# Altium PCB PCB_BSPDV1_1.PcbDoc
Units mm, origin at the board's own origin, x right, y up, seen from the top; angles counter-clockwise.
Board outline 58.04 x 53.09 mm, 4 copper layers (Top Layer, Int1 (GND), Int2 (PWR), Bottom Layer), stack 1.369 mm thick; 79 components, 58 nets, 256 pads, 50 vias.
Unrouted connection lines stored in the file: 2.
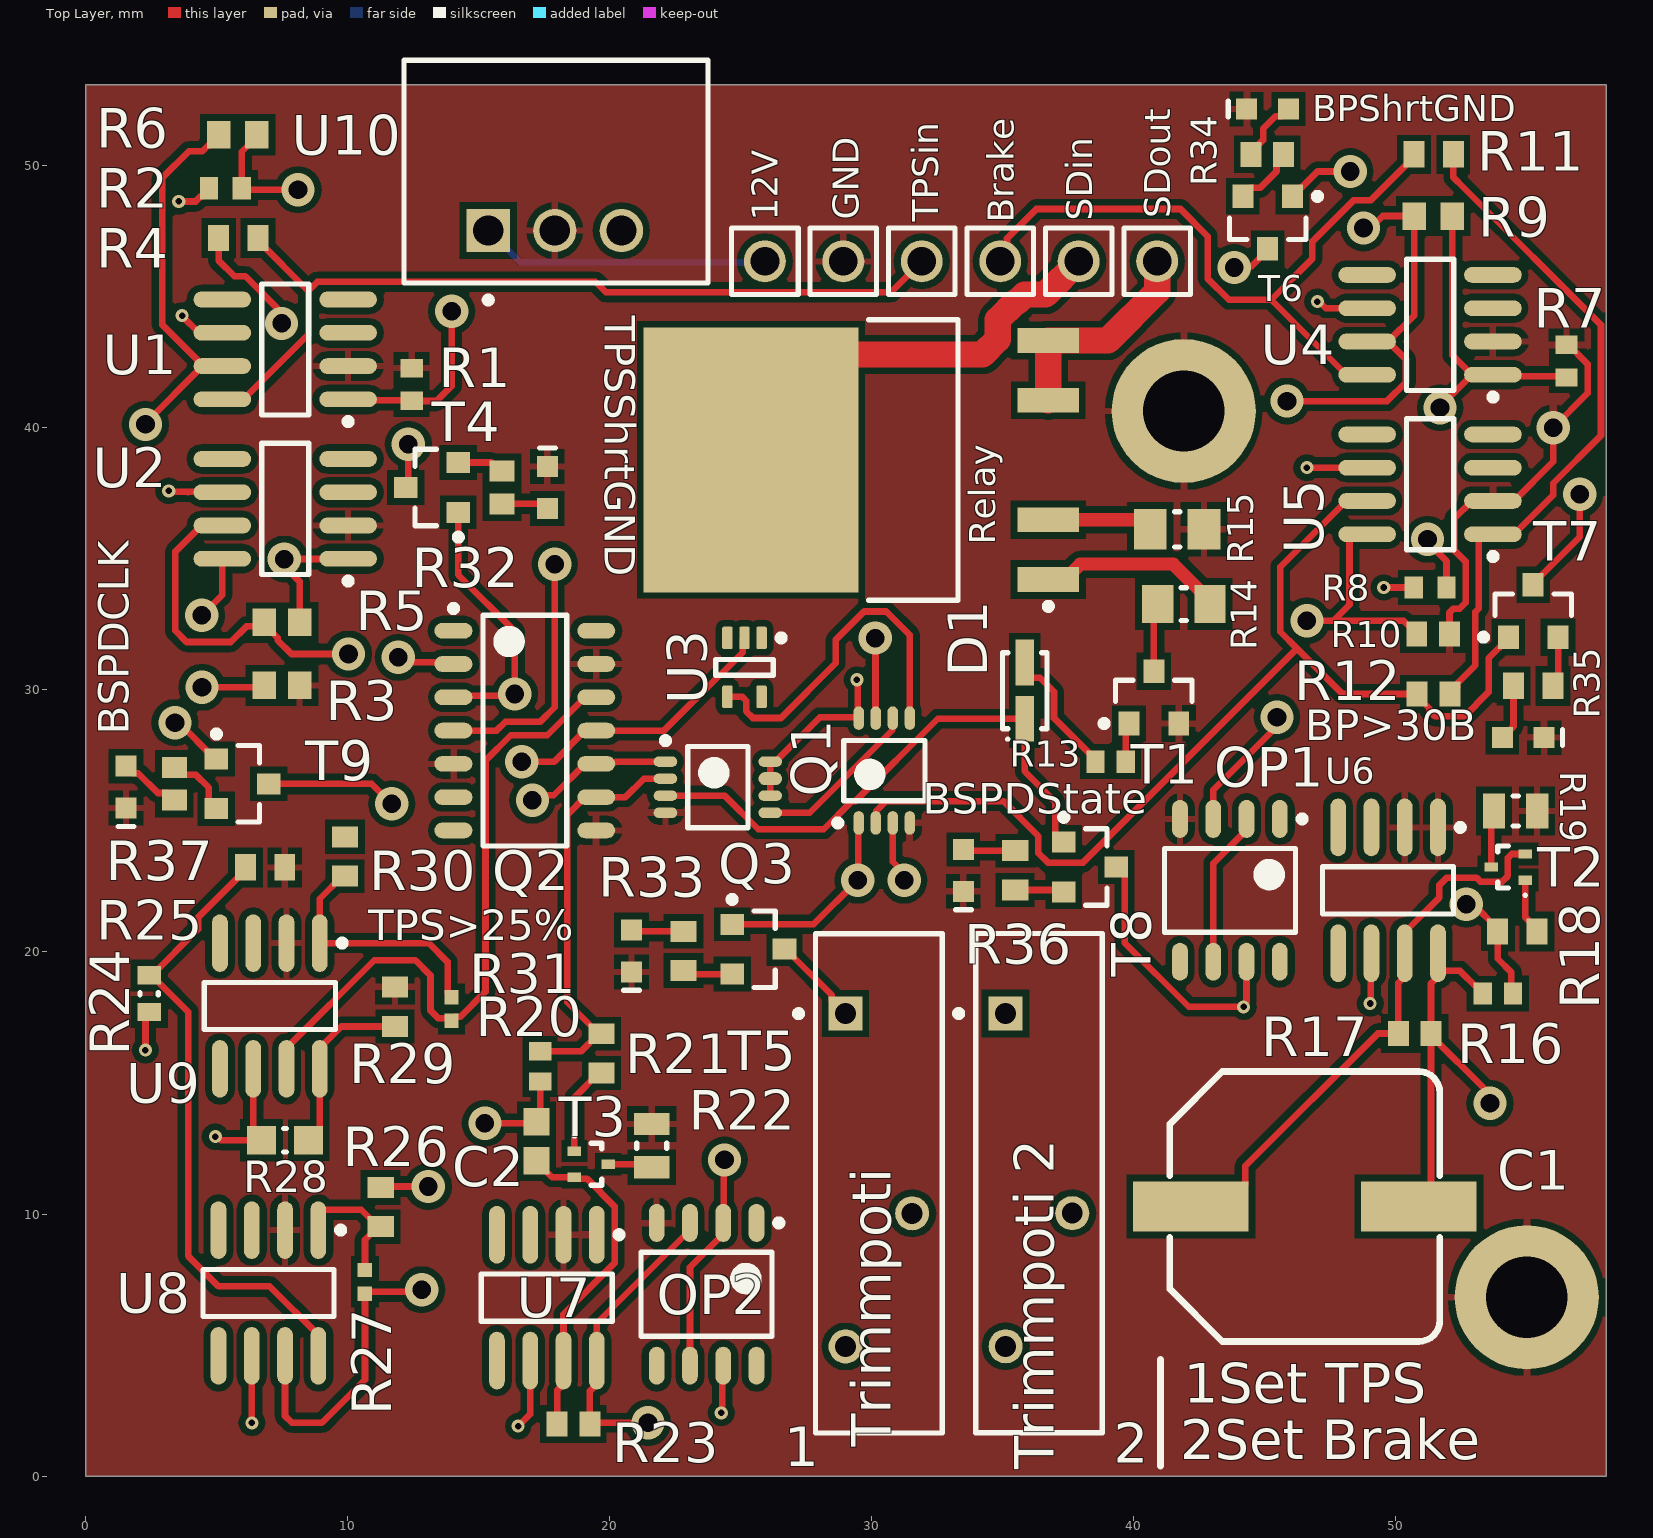
[diagram p0: Top Layer view]
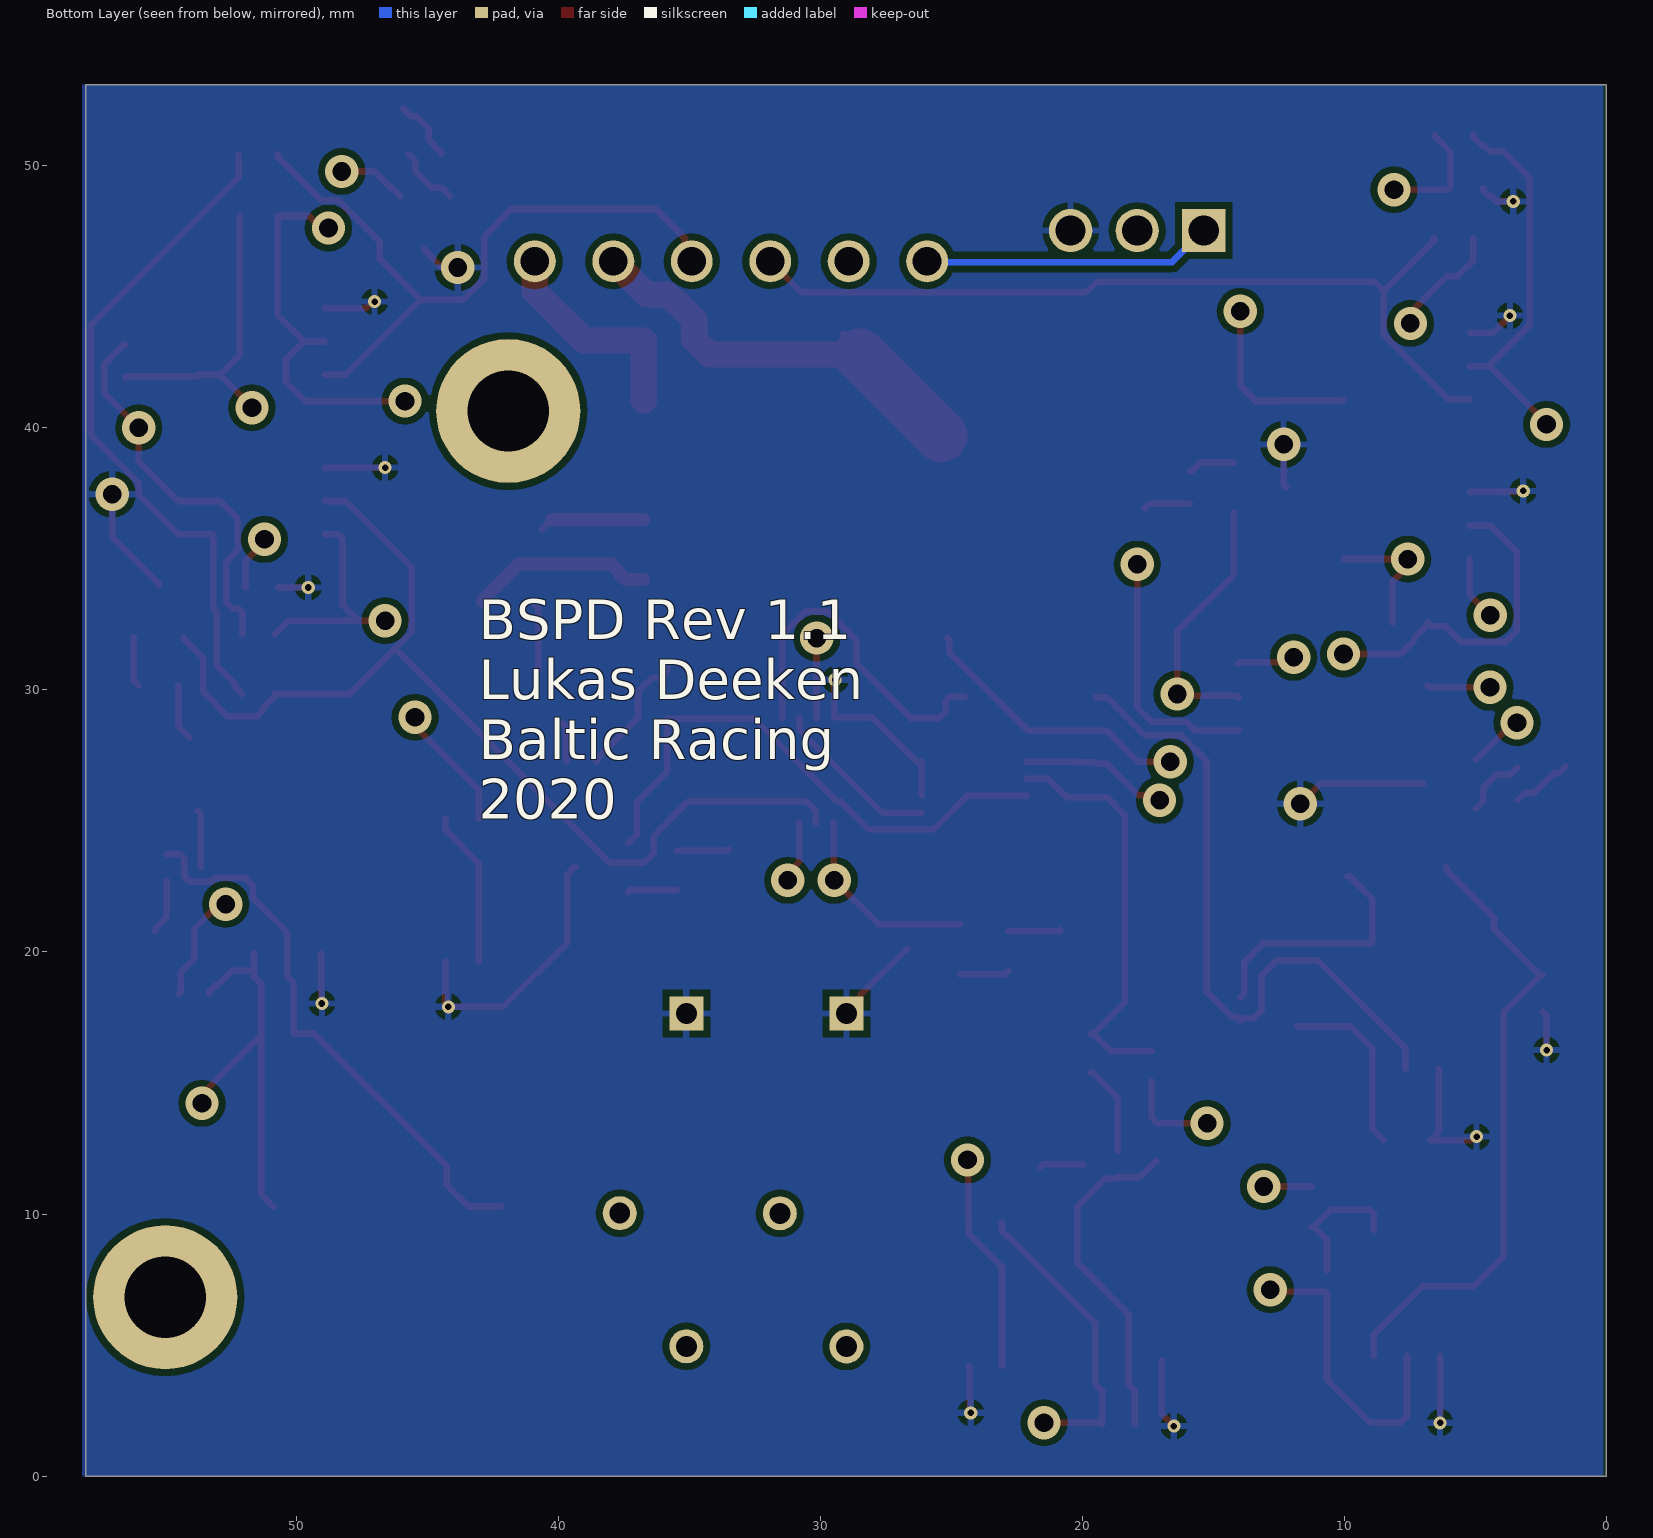
[diagram p1: Bottom Layer view, seen from below]
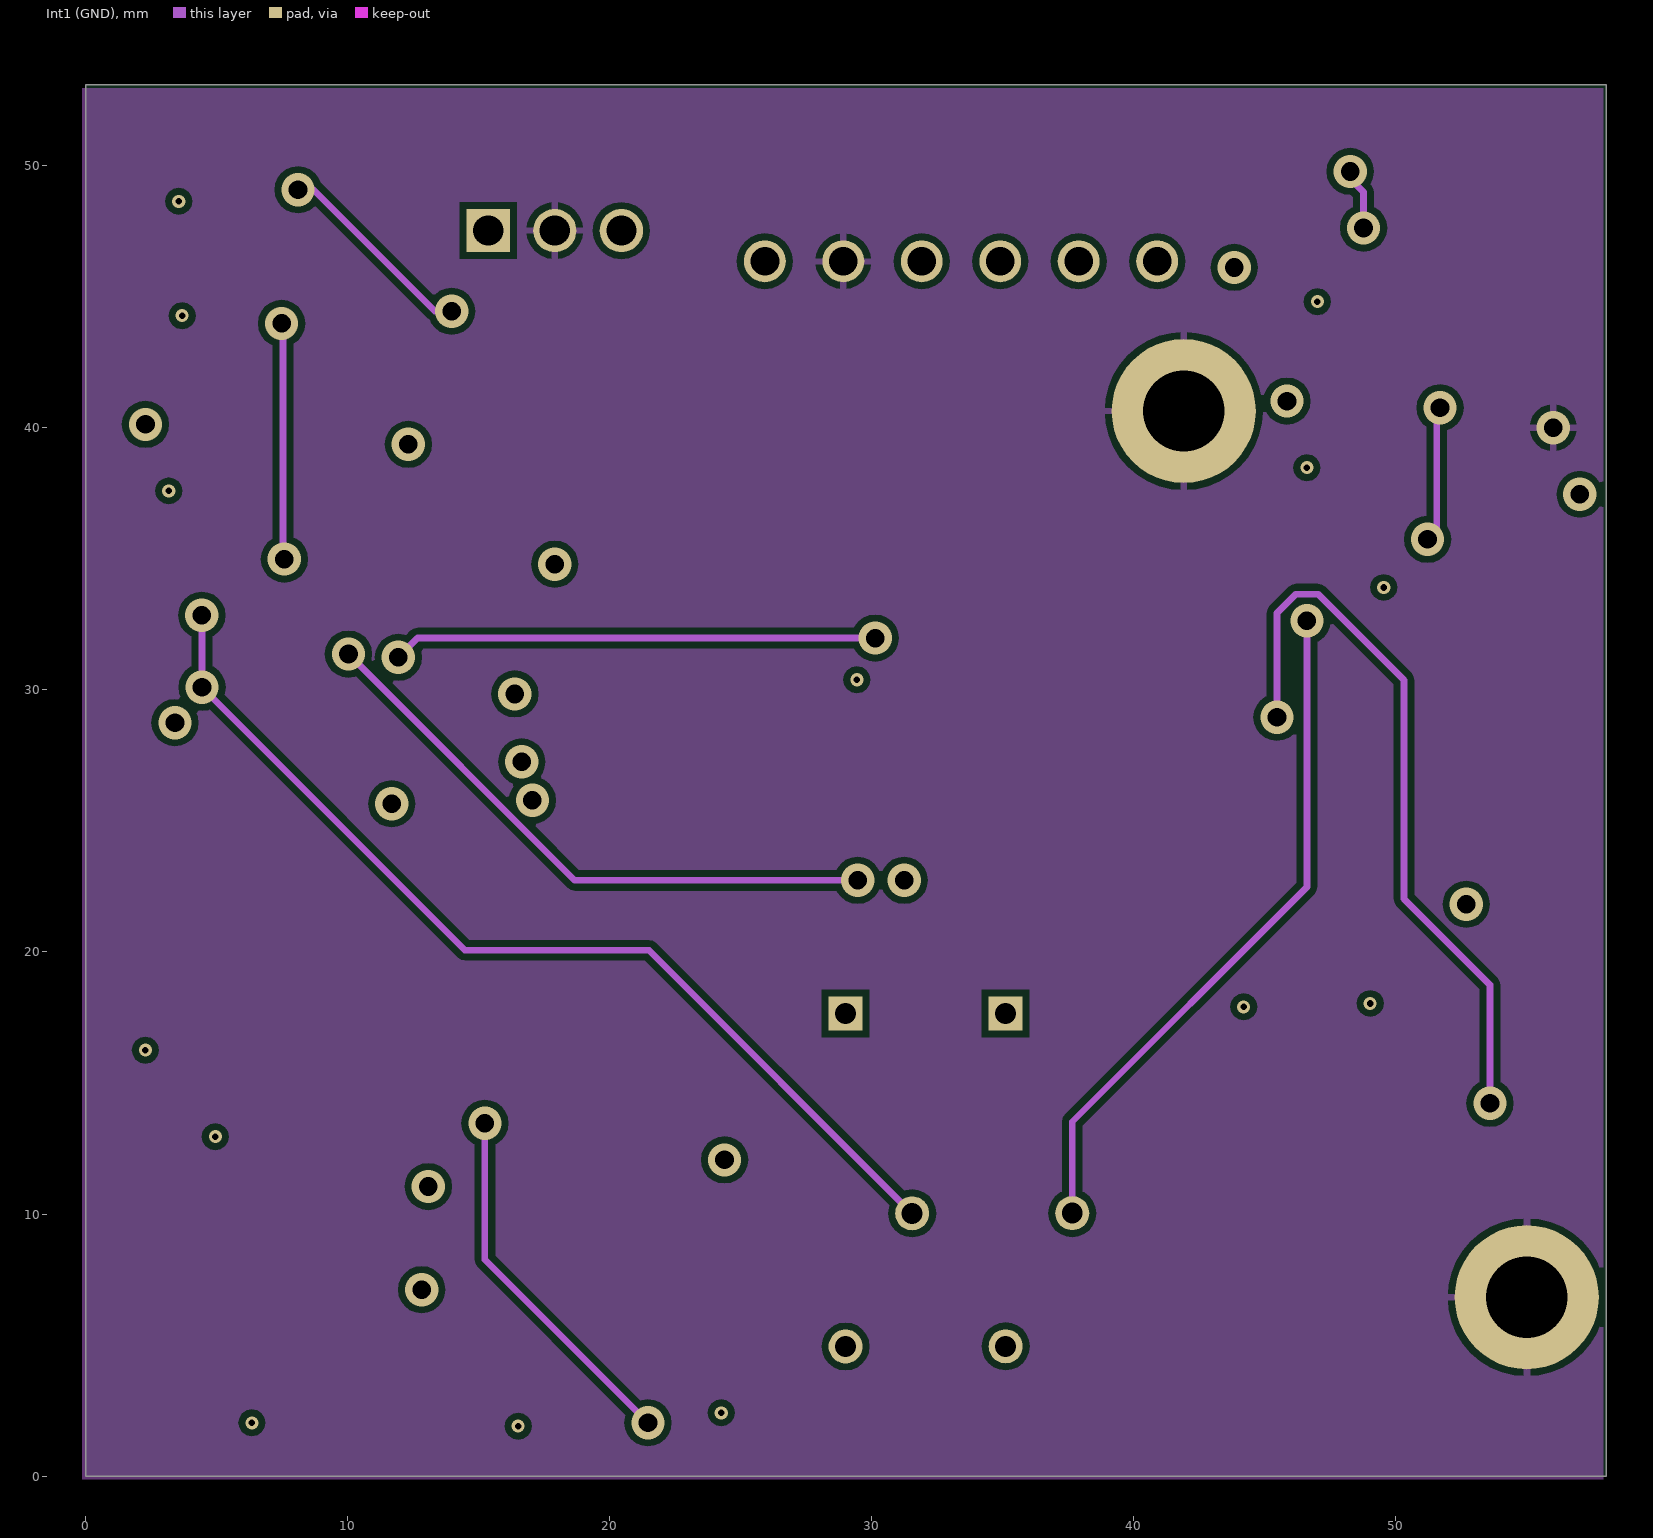
[diagram p2: Int1 (GND)]
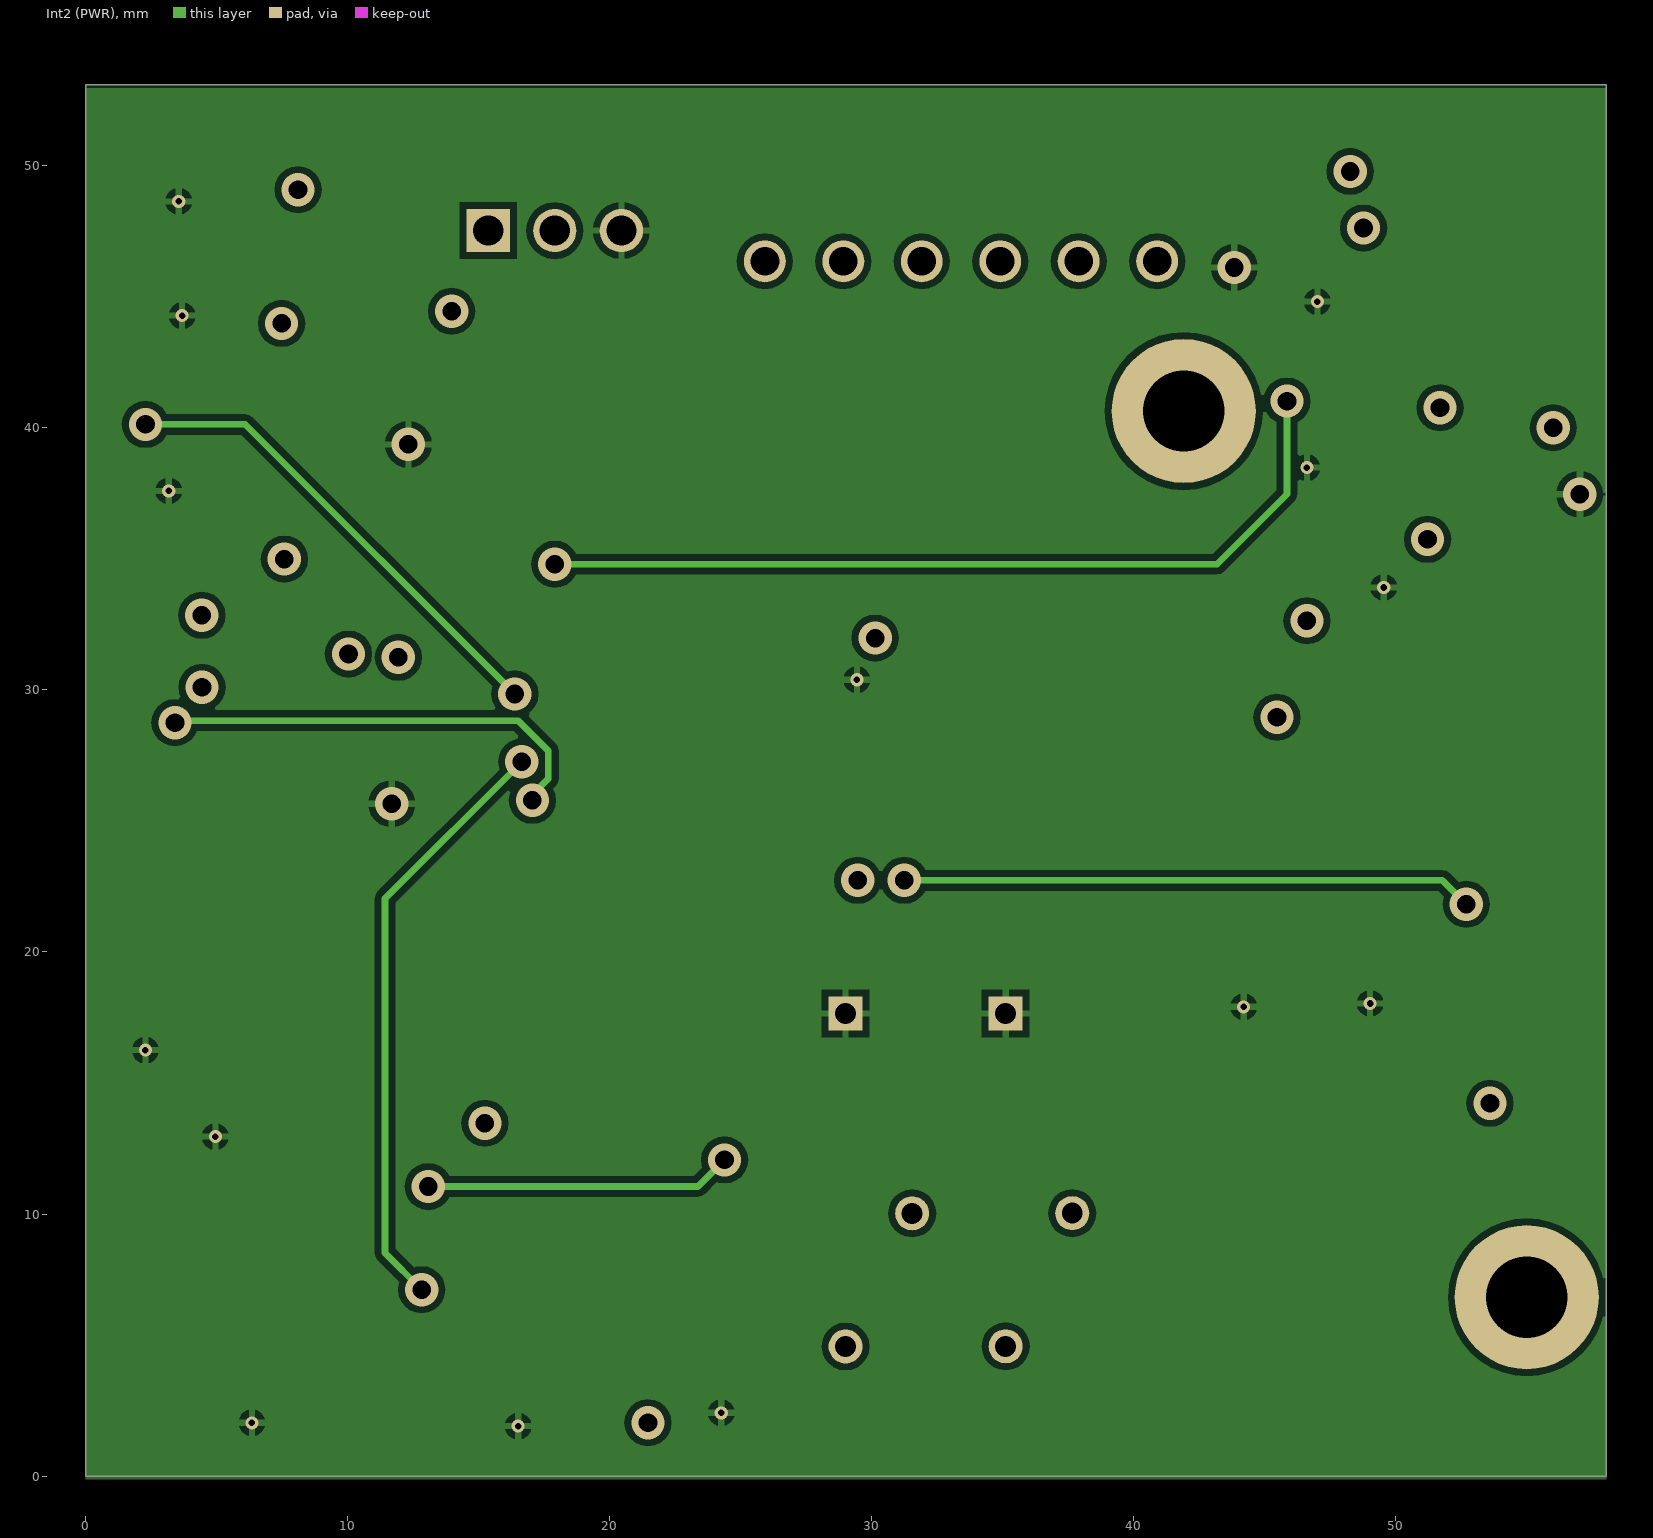
[diagram p3: Int2 (PWR)]

## Layer stack, top to bottom
Top Solder: solder mask 0.0254, SM-001, Dk 4
Top Layer: signal copper 0.035
Dielectric 1: prepreg 0.1295, PP-017, Dk 4.3
Dielectric 2: prepreg 0.1295, PP-017, Dk 4.3
Int1 (GND): signal copper 0.035
Dielectric 3: core 0.7112, Core-039, Dk 4.8
Int2 (PWR): signal copper 0.035
Dielectric 4: prepreg 0.1295, PP-017, Dk 4.3
Dielectric 5: prepreg 0.1295, PP-017, Dk 4.3
Bottom Layer: signal copper 0.035
Bottom Solder: solder mask 0.0254, SM-001, Dk 4

## Board outline
0,53.086 58.039,53.086 58.039,0 0,0

## Design rules (kind name [scope] priority, off if disabled: settings)
Clearance [All] p1: gap=0.254 ignorepadtopadclearanceinfootprint=FALSE except(0: Arc-Hole Track-Hole SMDPad-Hole THPad-Hole Via-Hole Fill-Hole Poly-Hole Region-Hole Text-Hole)
PolygonConnect [All] p1: connectstyle=Relief reliefconductorwidth=0.254 reliefentries=4 polygonreliefangle="90 Angle" airgapwidth=0.254
RoutingVias [All] p1: holewidth=0.711 width=1.27 viastyle="Through Hole" minholewidth=0.711 minwidth=1.27 maxholewidth=0.711 maxwidth=1.27
SolderMaskExpansion [All] p1: expansion=0.102 istentingtop=FALSE
Width [All] p1: maxlimit=0.254 minlimit=0.254 preferedwidth=0.254
30 further rules are at their usual default settings.

## Components (designator, comment, footprint, x,y, rotation, side; value= is the part's Value field where it differs from the comment)
12V "61300111121" 61300111121 25.923,46.355 r90 top (schematic designator "J1 VCC 5V")
BP>30B "150060GS75000" 0603_A 54.864,28.178 r180 top
BPShrtGND "150060RS75000" 0603_A 45.111,52.168 r0 top
Brake "61300111121" 61300111121 34.905,46.355 r90 top (schematic designator "J4 BrakeIn")
BSPDCLK "150060BS75000" 0603_A 1.547,26.289 r90 top
BSPDState "150060GS75000" 0603_A 33.496,23.114 r90 top
C1 "875075561006" WCAP-PSLC_10x12.4 46.53,10.287 r180 top value=150uF
C2 "C0603C335M9PACTU" CAPC1608X90X35NL15T15 17.204,12.778 r270 top
D1 "BAT46WH" DIOM2715X18N 35.841,29.972 r90 top
GND "61300111121" 61300111121 28.917,46.355 r90 top (schematic designator "J2 GND")
OP1 "AD711" "SOIC8; SOIC127P600X175-8N" 43.67,22.352 r270 top
OP2 "AD711" "SOIC8; SOIC127P600X175-8N" 23.699,6.936 r270 top
Q1 "Dual 2 input AND gate" "TSSOP8; TSOP65P400X110-8N"#1 30.48,26.924 r90 top
Q2 "Triple Input OR Gate" "SOIC14; SOIC127P600X175-14N" 16.764,28.448 r0 top
Q3 "74LVC1G74" "TSSOP8; TSOP65P400X110-8N"#2 24.13,26.289 r0 top
R1 "ERJ-3EKF1022V" RESC1608X55X30LL15T15 12.446,41.656 r90 top
R2 "ERJ-3EKF4753V" RESC1608X55X30LL15T15 5.334,49.149 r0 top
R3 "CRCW060325K5FKEA" RESC1609X50X30ML10T20 7.493,30.17 r180 top
R4 "RC0603FR-0710KL" RESC1608X55X25ML10T15 5.83,47.244 r180 top
R5 "CRCW0603402KFKEA" RESC1609X50X30ML10T20 7.493,32.574 r180 top
R6 "ERJ-3EKF2433V" RESC1608X55X30ML15T15 5.805,51.181 r180 top
R7 "ERJ-3EKF1022V" RESC1608X55X30LL15T15 56.515,42.545 r90 top
R8 "ERJ-3EKF4753V" RESC1608X55X30LL15T15 51.308,33.909 r0 top
R9 "ERJ-3EKF2433V" RESC1608X55X30ML15T15 51.435,48.085 r180 top
R10 "CRCW060313K0FKEA" RESC1609X50X30NL10T20 51.425,32.131 r180 top
R11 "RC0603FR-0710KL" RESC1608X55X25ML10T15 51.447,50.439 r0 top
R12 "CRCW0603249KFKEA" RESC1609X50X30NL10T20 51.435,29.845 r180 top
R13 "CRCW060330K0FKEA" RESC1609X50X30LL10T20 39.116,27.264 r0 top
R14 "RC0805FR-071KL" RESC2013X60X35ML10T20 41.91,33.274 r0 top
R15 "CRCW0805510KFKEA" RESC2013X50X30ML20T20 41.656,36.128 r180 top
R16 "CRCW060397K6FKEA" RESC1609X50X30LL10T20 53.896,18.415 r180 top
R17 "CRCW0603499KFKEA" RESC1609X50X30NL10T20 50.721,16.891 r180 top
R18 "RC0603FR-07100KL" RESC1608X55X25ML10T15 54.639,20.784 r0 top
R19 "CRCW0805100RFKEA" RESC2013X50X30LL20T20 54.57,25.379 r0 top
R20 "CRCW060397K6FKEA" RESC1609X50X30LL10T20 17.349,15.632 r270 top
R21 "RC0603FR-07100KL" RESC1608X55X25ML10T15 19.685,16.129 r270 top
R22 "CRCW0805100RFKEA" RESC2013X50X30LL20T20 21.607,12.608 r90 top
R23 "CRCW0603499KFKEA" RESC1609X50X30NL10T20 18.619,1.983 r180 top
R24 "51K1 1% 0603(1608)" RESC0603(1608)_L 2.427,18.407 r270 top value="51100.00 Ohm"
R25 "RC0603FR-07100KL" RESC1608X55X25ML10T15 6.852,23.229 r180 top
R26 "RC0603FR-0710KL" RESC1608X55X25ML10T15 11.263,10.266 r270 top
R27 "ERJ-2RKF1243X" RESC1005X40X25NL05T05 10.662,7.412 r270 top
R28 "118K 1% 0603(1608)" RESC0603(1608)_M 7.614,12.815 r180 top value="118000.00 Ohm"
R29 "RC0603FR-07100KL" RESC1608X55X25ML10T15 11.805,17.907 r270 top
R30 "RC0603FR-0710KL" RESC1608X55X25ML10T15 9.9,23.643 r270 top
R31 "ERJ-2RKF1243X" RESC1005X40X25NL05T05 13.964,17.826 r270 top
R32 "CRCW0603130KFKEA" RESC1609X50X30NL10T20 15.891,37.728 r90 top
R33 "RC0603FR-07100RL" RESC1608X55X25ML10T15 22.817,20.039 r90 top
R34 "CRCW0603130KFKEA" RESC1609X50X30NL10T20 45.095,50.439 r0 top
R35 "RC0603FR-07100RL" RESC1608X55X25ML10T15 55.245,30.157 r180 top
R36 "RC0603FR-07100RL" RESC1608X55X25ML10T15 35.476,23.114 r90 top
R37 "CRCW0603130KFKEA" RESC1609X50X30NL10T20 3.388,26.416 r90 top
Relay "AUIR3313S" "D2PAK5 ;DPAK228P1524X483-5N" 29.591,38.775 r180 top (schematic designator Relay1)
SDin "61300111121" 61300111121 37.9,46.355 r90 top (schematic designator J5SDin)
SDout "61300111121" 61300111121 40.894,46.355 r90 top (schematic designator "J6 SDout")
T1 "BC848BLT1G" ONSC-SOT-23-3-318-08_V 40.767,29.718 r90 top
T2 "MMBT3906TT1G" ONSC-SC-75-3-463-01_V 54.289,23.241 r180 top
T3 "MMBT3906TT1G" ONSC-SC-75-3-463-01_V 19.3,11.901 r0 top
T4 "BC848BLT1G" ONSC-SOT-23-3-318-08_V 13.224,37.728 r180 top
T5 "BC848BLT1G" ONSC-SOT-23-3-318-08_V 25.672,20.105 r0 top
T6 "BC848BLT1G" ONSC-SOT-23-3-318-08_V 45.111,47.835 r270 top
T7 "BC848BLT1G" ONSC-SOT-23-3-318-08_V 55.245,33.012 r90 top
T8 "BC848BLT1G" ONSC-SOT-23-3-318-08_V 38.33,23.241 r0 top
T9 "BC848BLT1G" ONSC-SOT-23-3-318-08_V 5.992,26.416 r0 top
TPS>25% "150060GS75000" 0603_A 20.838,20.039 r90 top
TPSin "61300111121" 61300111121 31.911,46.355 r90 top (schematic designator "J3 TPSin")
TPSShrtGND "150060RS75000" 0603_A 17.621,37.728 r270 top
Trimmpoti "3006P-1-104ZLF" BOUR-3006P-3_V 30.274,11.17 r270 top
"Trimmpoti 2" "3006P-1-104ZLF" BOUR-3006P-3_V 36.383,11.176 r270 top
U1 "LT1017IS8#PBF" LT-S8_N 7.62,42.993 r180 top
U2 "LT1017IS8#PBF" LT-S8_N 7.62,36.908 r180 top
U3 "Inverter SN74LVC1G04DCKR" DCK0005A_N 25.146,30.861 r270 top
U4 "LT1017IS8#PBF" LT-S8_N 51.308,43.93 r180 top
U5 "LT1017IS8#PBF" LT-S8_N 51.308,37.846 r180 top
U6 "LT1017IS8#PBF" LT-S8_N 49.705,22.352 r270 top
U7 "LT1017IS8#PBF" LT-S8_N 17.603,6.809 r270 top
U8 "LT1017IS8#PBF" LT-S8_N 6.979,6.986 r270 top
U9 "LT1017IS8#PBF" LT-S8_N 7.034,17.939 r270 top
U10 "R-78E5.0-0.5" REPO-R-78E-0.5-3_V 17.907,47.53 r0 top

## Footprints (in the part's own frame and the unit in brackets; to place one, negate y for a bottom-side part, rotate by r counter-clockwise, add the part's x,y. Pads: shape width x height; smd on the part's side, far side on the other; paste and mask are expansions set on the pad)
0603_A [mm] "Chip LED, 2-Leads, Body 1.6x0.8mm, IPC Medium Density"
  rect 0.8x0.8 smd: 1(-0.8,0) 2(0.8,0)
  silkscreen extent -1.5,-0.3 -1.5,0.3, body extent -0.8,-0.4 0.8,0.4, height 0.7
61300111121 [mm] "1pins, 1 row, straight, gold plating"
  round 1.6 hole 1.1: 1(0,0)
  silkscreen extent -1.27,-1.27 1.27,1.27, body extent -1.27,-1.27 1.27,1.27, height 8.57
BOUR-3006P-3_V [mm] "THD, 3-Leads, Body 19.05x4.83mm, Height 6.6mm"
  rect 1.3x1.3 hole 0.8: 1(-6.475,-1.27)
  round 1.3 hole 0.8: 2(1.145,1.27) 3(6.225,-1.27)
  silkscreen extent -9.53,-3.19 9.53,2.41, body extent -9.53,-2.41 11.05,2.41, height 6.6
CAPC1608X90X35NL15T15 [mm] "Chip Capacitor, 2-Leads, Body 1.60x0.81mm, IPC Medium Density"
  rect 1.05x1 smd: 1(-0.75,0) 2(0.75,0)
  body extent -0.88,-0.48 0.87,0.48, height 0.9
"D2PAK5 ;DPAK228P1524X483-5N" [mm] "D2-PAK, 5-Pads, Body 7,93x8,70mm (max), IPC Medium Density"
  rect 2.35x0.95 smd: 1(-7.15,4.56) 2(-7.15,2.28) 4(-7.15,-2.28) 5(-7.15,-4.56)
  rect 8.2x10.1 smd: 3(4.2,0)
  silkscreen extent -7.28,-5.35 -0.3,5.71, body extent -7.51,-5.33 7.74,5.33, height 4.83
DCK0005A_N [mm] "SOT23, 5-Leads, Body 2.15x1.4mm, Pitch 0.65mm, IPC Medium Density"
  rrect25% 0.85x0.4 smd: 1(-1.125,0.65) 2(-1.125,0) 3(-1.125,-0.65) 4(1.125,-0.65) 5(1.125,0.65)
  silkscreen extent -1.25,-1.1 0.3,1.53, body extent -1.14,-1 1.14,1, height 0.94
DIOM2715X18N [mm] "Molded Diode, 2-Leads, Body 2,70x1,55mm, IPC Medium Density"
  rect 1.75x0.7 smd: 1(-1.075,0) 2(1.075,0)
  silkscreen extent -1.9,-0.85 1.45,0.85, body extent -1.65,-0.85 1.65,0.85, height 1.8
LT-S8_N [mm] "SOP, 8-Leads, Body 4.9x3.9mm, Pitch 1.27mm, IPC Medium Density"
  oval 2.2x0.6 smd: 1(-2.4,1.905) 2(-2.4,0.635) 3(-2.4,-0.635) 4(-2.4,-1.905) 5(2.4,-1.905) 6(2.4,-0.635) 7(2.4,0.635) 8(2.4,1.905)
  silkscreen extent -2.53,-2.5 0.9,2.88, body extent -2,-2.5 2,2.5, height 1.76
ONSC-SC-75-3-463-01_V [mil] "SOT23, 3-Leads, Body 1.6x0.8mm, Pitch 0.5mm"
  rect 20x14.02 smd: 1(-25.49,19.68) 2(-25.49,-19.69) 3(25.49,0)
  silkscreen extent -27,-31 16,44, body extent -16,-31 16,31, height 35
ONSC-SOT-23-3-318-08_V [mm] "SOT23, 3-Leads, Body 2.92x1.3mm, Pitch 0.95mm"
  rect 0.9x0.8 smd: 1(-1,0.95) 2(-1,-0.95) 3(1,0)
  silkscreen extent -1.12,-1.46 0.65,2.02, body extent -0.65,-1.46 0.65,1.46, height 1.11
REPO-R-78E-0.5-3_V [mm] "THD, 3-Leads, Body 11.6x8.5mm, Pitch 2.54mm"
  rect 1.65x1.65 hole 1.15: 1(-2.54,0)
  round 1.65 hole 1.15: 2(0,0) 3(2.54,0)
  silkscreen extent -5.75,-2.77 5.85,6.5, body extent -5.75,-2 5.85,6.5, height 10.4
RESC0603(1608)_L [mm] "Chip Resistor, Body 1.6x0.8mm, IPC High Density"
  rect 0.7x0.9 smd: 1(-0.7,0) 2(0.7,0)
  silkscreen extent -0.05,-0.35 0.05,0.35, body extent -0.85,-0.47 0.85,0.47, height 0.6
RESC0603(1608)_M [mm] "Chip Resistor, Body 1.6x0.8mm, IPC Low Density"
  rect 1.1x1.1 smd: 1(-0.9,0) 2(0.9,0)
  silkscreen extent -0.05,-0.45 0.05,0.45, body extent -0.85,-0.47 0.85,0.47, height 0.6
RESC1005X40X25NL05T05 [mm] "Chip Resistor, 2-Leads, Body 1.00x0.50mm, IPC Medium Density"
  rect 0.55x0.55 smd: 1(-0.45,0) 2(0.45,0)
  body extent -0.53,-0.27 0.53,0.28, height 0.4
RESC1608X55X25ML10T15 [mm] "Chip Resistor, 2-Leads, Body 1.60x0.80mm, IPC Low Density"
  rect 0.8x1 smd: 1(-0.75,0) 2(0.75,0)
  body extent -0.85,-0.45 0.85,0.45, height 0.55
RESC1608X55X30LL15T15 [mm] "Chip Resistor, 2-Leads, Body 1.60x0.80mm, IPC High Density"
  rect 0.7x0.85 smd: 1(-0.625,0) 2(0.625,0)
  body extent -0.87,-0.48 0.87,0.48, height 0.55
RESC1608X55X30ML15T15 [mm] "Chip Resistor, 2-Leads, Body 1.60x0.80mm, IPC Low Density"
  rect 0.9x1.05 smd: 1(-0.725,0) 2(0.725,0)
  body extent -0.87,-0.48 0.87,0.48, height 0.55
RESC1609X50X30LL10T20 [mm] "Chip Resistor, 2-Leads, Body 1.55x0.85mm, IPC High Density"
  rect 0.7x0.85 smd: 1(-0.575,0) 2(0.575,0)
  body extent -0.82,-0.48 0.82,0.48, height 0.5
RESC1609X50X30ML10T20 [mm] "Chip Resistor, 2-Leads, Body 1.55x0.85mm, IPC Low Density"
  rect 0.9x1.05 smd: 1(-0.675,0) 2(0.675,0)
  body extent -0.82,-0.48 0.82,0.48, height 0.5
RESC1609X50X30NL10T20 [mm] "Chip Resistor, 2-Leads, Body 1.55x0.85mm, IPC Medium Density"
  rect 0.8x0.95 smd: 1(-0.625,0) 2(0.625,0)
  body extent -0.82,-0.48 0.82,0.48, height 0.5
RESC2013X50X30LL20T20 [mm] "Chip Resistor, 2-Leads, Body 2.00x1.25mm, IPC High Density"
  rect 0.85x1.35 smd: 1(-0.825,0) 2(0.825,0)
  silkscreen extent -0.1,-0.58 0.1,0.58, body extent -1.1,-0.72 1.1,0.72, height 0.5
RESC2013X50X30ML20T20 [mm] "Chip Resistor, 2-Leads, Body 2.00x1.25mm, IPC Low Density"
  rect 1.25x1.55 smd: 1(-1.025,0) 2(1.025,0)
  silkscreen extent -0.1,-0.67 0.1,0.67, body extent -1.1,-0.72 1.1,0.72, height 0.5
RESC2013X60X35ML10T20 [mm] "Chip Resistor, 2-Leads, Body 2.1x1.35mm, IPC Low Density"
  rect 1.2x1.45 smd: 1(-1,0) 2(1,0)
  silkscreen extent -0.1,-0.63 0.1,0.63, body extent -1.05,-0.68 1.05,0.67, height 0.6
"SOIC8; SOIC127P600X175-8N" [mm] "SOIC, 8-Leads, Body 4,90x3,90mm, Pitch 1,27mm, IPC Medium Density"
  oval 1.45x0.6 smd: 1(-2.725,1.905) 2(-2.725,0.635) 3(-2.725,-0.635) 4(-2.725,-1.905) 5(2.725,-1.905) 6(2.725,-0.635) 7(2.725,0.635) 8(2.725,1.905)
  silkscreen extent -2.85,-2.5 1.6,2.88, body extent -2,-2.5 2,2.5, height 1.75
"SOIC14; SOIC127P600X175-14N" [mm] "SOIC, 14-Leads, Body 8,65x3,90mm, Pitch 1,27mm, IPC Medium Density"
  oval 1.45x0.6 smd: 1(-2.725,3.81) 2(-2.725,2.54) 3(-2.725,1.27) 4(-2.725,0) 5(-2.725,-1.27) 6(-2.725,-2.54) 7(-2.725,-3.81) 8(2.725,-3.81) 9(2.725,-2.54) 10(2.725,-1.27) 11(2.725,0) 12(2.725,1.27) 13(2.725,2.54) 14(2.725,3.81)
  silkscreen extent -2.85,-4.4 1.6,4.78, body extent -3,-4.4 3,4.4, height 1.75
"TSSOP8; TSOP65P400X110-8N"#1 [mm] "TSOP, 8-Leads, Body 3,00x3,00mm, Pitch 0,65mm, IPC Medium Density"
  oval 0.9x0.4 smd: 1(-2,0.975) 2(-2,0.325) 3(-2,-0.325) 4(-2,-0.975) 5(2,-0.975) 6(2,-0.325) 7(2,0.325) 8(2,0.975)
  silkscreen extent -2.12,-1.55 1.15,1.9, body extent -1.55,-1.55 1.55,1.55, height 1.1
"TSSOP8; TSOP65P400X110-8N"#2 [mm] "TSOP, 8-Leads, Body 3,00x3,00mm, Pitch 0,65mm, IPC Medium Density"
  oval 0.9x0.4 smd: 1(-2,0.975) 2(-2,0.325) 3(-2,-0.325) 4(-2,-0.975) 5(2,-0.975) 6(2,-0.325) 8(2,0.975)
  oval 0.9x0.5 smd: 7(2,0.325)
  silkscreen extent -2.12,-1.55 1.15,1.9, body extent -1.55,-1.55 1.55,1.55, height 1.1
WCAP-PSLC_10x12.4 [mm] "Aluminium Polymer V-Chip SMT Capacitors, §¶10x12.4mm"
  rect 4.4x1.9 smd: 1(4.35,0) 2(-4.35,0)
  silkscreen extent -5.15,-5.15 5.15,5.15, body extent -5.5,-5.15 5.5,5.15, height 12.4

## Part data
12V Brake GND SDin SDout TPSin: "WR-PHD 2.54 mm THT Pin Header, 1p", Rated Current="3 A", Withstanding Voltage="500 VAC", Working Voltage="250 VAC", ComponentLink1Description=Manufacturer, ComponentLink1URL=http://www.we-online.de, ComponentLink2Description=Datasheet, ComponentLink2URL=http://katalog.we-online.de/em/datasheet/6130xx11121.pdf, Part Number=61300111121, Pin Number=1, Pitch="2.54 mm", Published Date="Aug 2017", Publisher="Wurth Elektronik"
BP>30B BSPDState TPS>25%: library part CMP-1426-00002-1, "SMD mono-color Chip LED, WL-SMCW, Green", Color=Green, Manufacturer="Wuerth Elektronik", ComponentLink1Description="Manufacturer URL", ComponentLink1URL=http://www.we-online.com, ComponentLink2Description=Datasheet, ComponentLink2URL=http://katalog.we-online.com/led/datasheet/150060GS75000.pdf, PackageReference=0603_A, PartNumber=150060GS75000
BPShrtGND TPSShrtGND: library part CMP-1426-00001-1, "SMD mono-color Chip LED, WL-SMCW, Red", Color=Red, Manufacturer="Wuerth Elektronik", ComponentLink1Description="Manufacturer URL", ComponentLink1URL=http://www.we-online.com, ComponentLink2Description=Datasheet, ComponentLink2URL=http://katalog.we-online.com/led/datasheet/150060RS75000.pdf, PackageReference=0603_A, PartNumber=150060RS75000
BSPDCLK: library part CMP-1426-00003-1, "SMD mono-color Chip LED, WL-SMCW, Blue", Color=Blue, Manufacturer="Wuerth Elektronik", ComponentLink1Description="Manufacturer URL", ComponentLink1URL=http://www.we-online.com, ComponentLink2Description=Datasheet, ComponentLink2URL=http://katalog.we-online.com/led/datasheet/150060BS75000.pdf, PackageReference=0603_A, PartNumber=150060BS75000
C1: "WCAP-PSLC Aluminum Polymer Capacitors, size Ф10x12.4mm, 25V DC, 150uF", Operating Temperature="-55 °C up to +105 °C", Rated Voltage="25V DC", ComponentLink1Description=Manufacturer, ComponentLink1URL=http://www.we-online.de, ComponentLink2Description=Datasheet, ComponentLink2URL=http://katalog.we-online.de/pbs/datasheet/875075561006.pdf, Life Cycle=2000h, Part Number=875075561006, Published Date="June 2017", Publisher="Wurth Elektronik", Size=Ф10x12.4mm
C2: library part CMP-2006-02261-1, Manufacturer=Kemet, Part Number=C0603C335M9PACTU
OP1 OP2: Supplier Part Number 1=584-AD711JRZ, Supplier 1=Mouser
Q1: library part 74LVC2G08-Q100, Supplier Part Number 1=771-74LVC2G08DP-G, Supplier 1=Mouser
Q2: library part 74HCT4075D,653, Supplier Part Number 1=771-74HCT4075D-T, Supplier 1=Mouser
Q3: Supplier Part Number 1=771-LVC1GDP125, Supplier 1=Mouser
R1 R7: library part CMP-2000-00185-1, Manufacturer=Panasonic, Part Number=ERJ-3EKF1022V
R2 R8: library part CMP-2000-00528-1, Manufacturer=Panasonic, Part Number=ERJ-3EKF4753V
R3: library part CMP-2000-03129-1, Manufacturer="Vishay Dale", Part Number=CRCW060325K5FKEA
R4 R11 R26 R30: library part CMP-2100-03664-1, "Chip Resistor, 10 KOhm, +/- 1%, 01 W, -55 to 155 degC, 0603 (1608 Metric), RoHS, Tape and Reel", Case Code (Imperial)=0603, Case Code (Metric)=1608, Manufacturer=Yageo, Max Operating Temperature=155degC, Min Operating Temperature=-55degC, Package Description="2-Pin Surface Mount Device, Body 1.6 x 0.8 mm", Power Rating=100mW, Resistance=10KOhm, Temperature Coefficient=100ppm/degreesC, Tolerance=1%, Voltage Rating=75V, Voltage Rating (DC)=50V, Case/Package=0603, Composition=ThickFilm, Datasheet URL=http://www.yageo.com/NewPortal/yageodocoutput?fileName=/pdf/R-Chip/PYu-RC_Group_51_RoHS_L_5.pdf, Datasheet Version="Rev. 5, 10/2016", Depth=0.8mm, Height=0.45mm, Lead Free=LeadFree, Lead Pitch=0.3mm, Length=1.6mm, Manufacturer URL=http://www.yageo.com/, Military Standard=Not, Number of Pins=2, Package Reference=0603, Packaging=TapeandReel, REACH SVHC=NoSVHC, RoHSCompliant=true, Termination=SMD/SMT, Weight=7.1E-05oz, Width=0.8mm
R5: library part CMP-2000-03334-1, Manufacturer="Vishay Dale", Part Number=CRCW0603402KFKEA
R6 R9: library part CMP-2000-00367-1, Manufacturer=Panasonic, Part Number=ERJ-3EKF2433V
R10: library part CMP-2000-03895-1, Manufacturer="Vishay Dale", Part Number=CRCW060313K0FKEA
R12: library part CMP-2000-03115-1, Manufacturer="Vishay Dale", Part Number=CRCW0603249KFKEA
R13: library part CMP-2000-03223-1, Manufacturer="Vishay Dale", Part Number=CRCW060330K0FKEA
R14: library part CMP-2100-03671-1, "Chip Resistor, 1 KOhm, +/- 1%, 125 mW, -55 to 155 degC, 0805 (2012 Metric), RoHS, Tape and Reel", Case Code (Imperial)=0805, Case Code (Metric)=2012, Manufacturer=Yageo, Max Operating Temperature=155degC, Max Power Dissipation=125mW, Min Operating Temperature=-55degC, Package Description="2-Pin Surface Mounted Device, Body 2 x 1.25 mm", Package Quantity=1, Resistance=1KOhm, Temperature Coefficient=100ppm/degreesC, Tolerance=1%, Voltage Rating=150V, Case/Package=0805, Composition=ThickFilm, Datasheet URL=http://www.yageo.com/NewPortal/yageodocoutput?fileName=/pdf/R-Chip/PYu-RC_Group_51_RoHS_L_5.pdf, Datasheet Version="Rev. 5, 10/2016", Depth=1.25mm, Height=0.024inch, Lead Free=LeadFree, Length=0.079inch, Manufacturer URL=http://www.yageo.com/, Military Standard=Not, Number of Pins=2, Number of Terminations=2, Package Reference=0805, Packaging=TapeandReel, Power Rating=125mW, REACH SVHC=Unknown, RoHSCompliant=true, Termination=SMD/SMT, Voltage Rating (DC)=150V, Width=0.049inch
R15: library part CMP-2001-03987-1, Manufacturer="Vishay Dale", Part Number=CRCW0805510KFKEA
R16 R20: library part CMP-2000-03650-1, Manufacturer="Vishay Dale", Part Number=CRCW060397K6FKEA
R17 R23: library part CMP-2000-03389-1, Manufacturer="Vishay Dale", Part Number=CRCW0603499KFKEA
R18 R21 R25 R29: library part CMP-2100-03662-1, "Chip Resistor, 100 KOhm, +/- 1%, 0.1 W, -55 to 155 degC, 0603 (1608 Metric), RoHS, Tape and Reel", Case Code (Imperial)=0603, Case Code (Metric)=1608, Manufacturer=Yageo, Max Operating Temperature=155degC, Min Operating Temperature=-55degC, Package Description="2-Pin Surface Mount Device, Body 1.6 x 0.8 mm", Power Rating=100mW, Resistance=100KOhm, Temperature Coefficient=100ppm/degreesC, Tolerance=1%, Voltage Rating=50V, Case/Package=0603, Composition=ThickFilm, Datasheet URL=http://www.yageo.com/NewPortal/yageodocoutput?fileName=/pdf/R-Chip/PYu-RC_Group_51_RoHS_L_5.pdf, Datasheet Version="Rev. 5, 10/2016", Depth=0.8mm, Height=0.45mm, Lead Free=LeadFree, Length=1.6mm, Manufacturer URL=http://www.yageo.com/, Military Standard=Not, Number of Pins=2, Package Reference=0603, Packaging=TapeandReel, REACH SVHC=NoSVHC, RoHSCompliant=true, Termination=SMD/SMT, Voltage Rating (DC)=50V, Width=0.8mm
R19 R22: library part CMP-2001-04901-1, Manufacturer="Vishay Dale", Part Number=CRCW0805100RFKEA
R24: library part CMP-1012-00704-1, "51K1 0.1W 1% 0603 (1608 Metric)  SMD", Case-EIA=0603, Case-Metric=1608, Power="0.1 W", Tolerance="1 %", Technology=SMT
R27 R31: library part CMP-2002-00654-1, Manufacturer=Panasonic, Part Number=ERJ-2RKF1243X
R28: library part CMP-1012-00743-1, "118K 0.1W 1% 0603 (1608 Metric)  SMD", Case-EIA=0603, Case-Metric=1608, Power="0.1 W", Tolerance="1 %", Technology=SMT
R32 R34 R37: library part CMP-2000-03887-1, Manufacturer="Vishay Dale", Part Number=CRCW0603130KFKEA
R33 R35 R36: library part CMP-2100-03663-1, "Chip Resistor, 100 Ohm, +/- 1%, 0.1 W, -55 to 155 degC, 0603 (1608 Metric), RoHS, Tape and Reel", Case Code (Imperial)=0603, Case Code (Metric)=1608, Manufacturer=Yageo, Max Operating Temperature=155degC, Min Operating Temperature=-55degC, Package Description="2-Pin Surface Mount Device, Body 1.6 x 0.8 mm", Power Rating=100mW, Resistance=100Ohm, Temperature Coefficient=100ppm/degreesC, Tolerance=1%, Voltage Rating=50V, Case/Package=0603, Composition=ThickFilm, Datasheet URL=http://www.yageo.com/NewPortal/yageodocoutput?fileName=/pdf/R-Chip/PYu-RC_Group_51_RoHS_L_5.pdf, Datasheet Version="Rev. 5, 10/2016", Depth=0.8mm, Height=0.45mm, Lead Free=LeadFree, Length=1.6mm, Manufacturer URL=http://www.yageo.com/, Military Standard=Not, Number of Pins=2, Package Reference=0603, Packaging=TapeandReel, REACH SVHC=Unknown, RoHSCompliant=true, Termination=SMD/SMT, Voltage Rating (DC)=50V, Width=0.8mm
T1 T4 T5 T6 T7 T8 T9: library part CMP-1048-00679-1, "General Purpose Transistor, NPN Silicon, 3-Pin SOT-23, Pb-Free, Tape and Reel", Manufacturer="On Semiconductor", ComponentLink1Description="Manufacturer URL", ComponentLink1URL=http://www.onsemi.com/, ComponentLink2Description=Datasheet, ComponentLink2URL=http://www.onsemi.cn/pub_link/Collateral/BC846ALT1-D.PDF, ComponentLink3Description="Package Specification", ComponentLink3URL=http://www.onsemi.cn/pub_link/Collateral/318-08.PDF, DatasheetVersion="Rev. 11", fT Min (MHz)=100, IC Continuous (A)=0.1, Mounting Technology="Surface Mount", PackageDescription="3-Pin Small Outline Transistor, Body 2.92 x 1.3 mm, Pitch 0.95 mm", PackageReference=SOT-23-3-318-08, PackageVersion="Rev. AP, 11/2009", Packing="Tape and Reel", PartNumber=BC848BLT1G, Polarity=NPN, RoHS=TRUE
T2 T3: library part CMP-1048-00413-1, "General Purpose Transistor, PNP Silicon, 3-Pin SC-75, Pb-Free, Tape and Reel", Manufacturer="On Semiconductor", ComponentLink1Description="Manufacturer URL", ComponentLink1URL=http://www.onsemi.com/, ComponentLink2Description=Datasheet, ComponentLink2URL=http://www.onsemi.cn/pub_link/Collateral/MMBT3906TT1-D.PDF, ComponentLink3Description="Package Specification", ComponentLink3URL=http://www.onsemi.com/pub_link/Collateral/463-01.PDF, DatasheetVersion="Rev. 1", fT Min (MHz)=250, IC Continuous (A)=-0.2, Mounting Technology="Surface Mount", PackageDescription="3-Pin Small Outline Transistor, Body 1.6 x 0.8 mm, Pitch 0.5 mm", PackageReference=SC-75-3-463-01, PackageVersion="Rev. F, 07/2005", Packing="Tape and Reel", PartNumber=MMBT3906TT1G, Polarity=PNP, RoHS=TRUE
Trimmpoti "Trimmpoti 2": library part CMP-0975-00010-1, "Trimming Potentiometer, 100K Ohm +/- 10%, -55 to 125 degC, 3-Pin 19.05 x 4.83 x 6.6 mm THD, RoHS", Manufacturer=Bourns, Resistance (kOhm)=100, Resistance Tolerance="+/- 10%", Temperature Range="-55 to 125 degC", ComponentLink1Description="Manufacturer URL", ComponentLink1URL=http://www.bourns.com/, ComponentLink2Description=Datasheet, ComponentLink2URL=http://www.bourns.com/data/global/pdfs/3006.pdf, ComponentLink3Description="Package Specification", ComponentLink3URL=http://www.bourns.com/data/global/pdfs/3006.pdf, DatasheetVersion=Apr-14, Mounting Technology="Through Hole", Number of Turns=15, PackageDescription="3-Pin THD, Body 19.05 x 4.83 mm, Height 6.6 mm", PackageReference=3006P-3, PackageVersion=Apr-14, PartNumber=3006P-1-104ZLF, RoHS=TRUE, Rotational Life="200 Cycles"
U1 U2 U4 U5 U6 U7 U8 U9: library part CMP-0360-00547-2, "Micropower Comparator, 2 Channels, 1.2 to 40 V, -40 to +85 degC, 8-pin SOP (S8)", Generic Part Number=LT1017, Manufacturer="Linear Technology", Supply Current (uA) Guaranteed=60, Supply Current (uA) Typical=30, Supply Voltage Range="1.2 to 40 V", Channels (#)=2, ComponentLink1Description="Manufacturer URL", ComponentLink1URL=http://www.linear.com/, ComponentLink2Description=Datasheet, ComponentLink2URL=http://cds.linear.com/docs/en/datasheet/10178ff.pdf, ComponentLink3Description="Package Specification", ComponentLink3URL=http://cds.linear.com/docs/en/packaging/05081610_G_SO8.pdf, DatasheetVersion="Rev F", Features=Comparator, Mounting Technology="Surface Mount", PackageDescription="8-Pin Plastic Small Outline (Narrow .150 Inch), Body 4.9 x 3.9 mm, Pitch 1.27 mm", PackageReference=S8, PartNumber=LT1017IS8#PBF, Prop Delay (us)=22, RoHS=Y, Vos (mV) Guaranteed=1, Vos (mV) Typical=0.4, Vs Max (V)=40, Vs Min (V)=1.2
U3: library part CMP-0859-00252-3, "Single Inverter, DCK0005A, LARGE T&R", F @ Nom Voltage(Max)(Mhz)=150, Generic Part Number=SN74LVC1G04, ICC @ Nom Voltage(Max)(mA)=0.01, Manufacturer="Texas Instruments", Operating Temperature Range(C)="-40 to 125,-40 to 85", Rating=Catalog, tpd @ Nom Voltage(Max)(ns)=7.5,5.2,4.2,3.7, Voltage(Nom)(V)=1.8,2.5,3.3,5, 3-State Output=No, Bits(#)=1, DatasheetVersion=SCES214AD, Input Type=CMOS/TTL, Logic=Inverting, Output Drive (IOL/IOH)(Max)(mA)=32/-32, Output Type=CMOS, PackageReference=DCK0005A, Schmitt Trigger=No, Sub-Family="Inverting Buffer/Driver", Technology Family=LVC, VCC(Max)(V)=5.5, VCC(Min)(V)=1.65
U10: library part CMP-2000-06922-2, "DC/DC-Converter, 5 V Single Output, 500 mA, -40 to 85 degC, 3-Pin THD, RoHS, Tube", Current - Output (Max)=500mA, Manufacturer="Recom Power", Operating Temperature=-40°C~85°C, Package Description="3-Pin Through Hole Device, Body 11.6 x 8.5 mm, Pitch 2.54 mm", Package Reference="SIP Module", Package Version="Rev. 0", Datasheet URL=http://www.recom-power.com/pdf/Innoline/R-78Exx-0.5.pdf, Datasheet Version=01/2017, Efficiency=92%, Manufacturer URL=http://www.recom-power.com/us/americas/home.html, Mounting Technology=ThroughHole, Number of Outputs=1, Packaging=Tube, VIN Max=28V, VIN Min=7V, VOUT=5V

## Free pads (board coordinates)
  round 5.5 hole 3.1: 2(41.91,40.64) 2(54.997,6.825)

## Via types
v1: diameter 1.27, hole 0.711, Top Layer to Bottom Layer, 36 vias
v2: diameter 0.5, hole 0.25, Top Layer to Bottom Layer, 14 vias

## Nets (pads, with @x,y where several pads share a name; then routed paths per layer and width w, separated by ;. In a path a pad name is that pad's centre, name@x,y a point inside that pad or via, vN(x,y) a via of type N, cw(c..) or ccw(c..) an arc to the next point about the centre after c; other vN are vias at no path point)
5V: "Trimmpoti 2.1" OP1.7 OP2.7 Q1.8 Q3.6 Q3.7 Q3.8 R2.1 R8.1 R24.2 R28.2 T4.3 T5.3 T6.3 T7.3 T8.3 T9.3 Trimmpoti.1 U1.6 U2.6 U4.6 U5.6 U6.6 U7.6 U8.6 U9.6 U10.3 | length 59
  Top Layer w0.254: v2(2.286,16.256) 2.286,17.566 R24.2 ; v2(3.175,37.592) 3.199,37.568 3.937,37.568 ; v2(3.556,48.641) 4.201,48.641 4.411,48.851 4.486,48.851 4.709,49.074 R2.1 ; v2(3.683,44.282) 3.683,44.271 4.326,43.628 U1.6 ; 3.925,37.555 3.937,37.568 ; v2(4.953,12.954) 5.02,12.954 5.159,12.815 R28.2 6.399,13.13 U9.6 ; U2.6 5.196,37.568 3.937,37.568 ; U8.6 6.347,4.583 6.347,2.035 v2(6.35,2.032) ; T9.3 10.922,26.416 v1(11.684,25.654) ; T4.3 12.319,37.823 v1(12.319,39.37) ; v2(16.51,1.905) 16.968,2.363 U7.6 ; v2(24.257,2.413) 24.296,2.452 24.296,4.172 OP2.7 ; Q3.6 Q3.7 Q3.8 26.33,27.264 28.025,28.959 29.47,28.959 29.47,30.351 v2(29.435,30.386) ; T5.3 26.722,20.105 28.481,18.346 28.481,18.168 Trimmpoti.1 ; T8.3 39.38,23.241 39.653,22.968 39.653,20.351 42.096,17.907 v2(44.196,17.907) 44.196,17.974 44.305,18.082 OP1.7 ; v1(43.835,46.121) 43.882,46.168 44.495,46.168 45.111,46.785 T6.3 ; v2(46.609,38.481) U5.6 ; v2(47.009,44.817) 47.076,44.817 47.327,44.565 U4.6 ; v2(49.022,18.034) 49.046,18.058 49.046,19.928 U6.6 ; v2(49.539,33.909) R8.1 ; T7.3 55.245,34.062 57.023,35.84 v1(57.023,37.465)
10sIntegrator: OP1.2 OP1.6 R30.1 | length 6
  Top Layer w0.254: OP1.6 43.035,23.382 44.305,24.652 OP1.2
12V: 12V.1 U10.1 | length 11.1
  Bottom Layer w0.254: U10.1 16.573,46.324 25.891,46.324 12V.1
500msIntegrator: OP2.2 OP2.6 R26.1 | length 22
  Top Layer w0.254: R26.1 11.296,11.049 v1(13.081,11.049) ; OP2.6 23.064,7.966 24.334,9.236 OP2.2 24.359,9.686 24.359,12.04 v1(24.384,12.065)
  Int2 (PWR) w0.254: v1(13.081,11.049) 23.368,11.049 v1(24.384,12.065)
!BSPDaus: Q1.6 Q3.5 | length 6.4
  Top Layer w0.254: Q3.5 27.637,25.314 30.786,28.463 30.786,28.905 Q1.6
BP>30Bar: Q1.2 R12.2 T7.1 U5.7 | length 40.4
  Top Layer w0.254: Q1.2 30.174,24.943 30.174,25.385 30.544,25.755 35.024,25.755 36.357,24.422 36.357,23.775 36.722,23.41 38.061,23.41 46.231,31.58 ; U5.7 48.108,37.211 45.593,34.696 45.593,32.218 46.231,31.58 ; T7.1 54.295,31.962 53.543,31.21 53.543,29.914 52.618,28.989 51.502,28.989 51.279,29.212 51.279,29.301 50.81,29.77 R12.2 47.966,29.845 46.231,31.58
BPShrtGND: Q2.4 R9.2 T6.1 U4.7 | length 62.1
  Top Layer w0.254: Q2.4 15.683,28.448 16.013,28.778 17.348,28.778 17.907,29.337 v1(17.907,34.798) ; v1(45.847,41.021) 49.667,41.021 50.389,41.743 50.389,42.614 U4.7@49.708,43.295 ; T6.1 46.061,48.885 46.334,49.158 46.384,49.158 47.01,49.784 v1(48.26,49.784) ; v1(48.768,47.625) 49.043,47.625 49.502,48.085 R9.2 50.71,44.297 U4.7@49.708,43.295 ; U4.7 U4.7@49.708,43.295
  Int1 (GND) w0.254: v1(48.26,49.784) 48.26,49.509 48.768,49.001 v1(48.768,47.625)
  Int2 (PWR) w0.254: v1(17.907,34.798) 43.18,34.798 45.847,37.465 v1(45.847,41.021)
BrakeIn: Brake.1 R11.1 U4.8 | length 26.9
  Top Layer w0.254: Brake.1 35.163,46.613 35.163,47.228 36.285,48.35 41.784,48.35 42.819,47.314 42.819,45.7 43.631,44.888 45.246,44.888 ; U4.8 48.108,42.025 45.246,44.888 ; R11.1 50.697,50.339 49.04,48.682 48.388,48.682 46.817,47.111 46.817,46.459 45.246,44.888
BSPDaus: D1.1 Q3.3 T8.1 | length 21.3
  Top Layer w0.254: Q3.3 24.388,25.964 25.669,24.683 28.172,24.683 29.244,25.755 29.378,25.755 32.52,28.897 D1.1 35.841,26.89 37.007,25.723 37.007,24.464 37.28,24.191 T8.1
BSPDpulse: Q2.10 Q3.1 T9.1 | length 24.7
  Top Layer w0.254: v1(3.413,28.752) 3.556,28.752 4.942,27.366 T9.1 ; v1(17.053,25.786) 17.247,25.98 17.866,25.98 19.064,27.178 Q2.10 19.555,27.244 20.216,27.244 20.236,27.264 Q3.1
  Int2 (PWR) w0.254: v1(3.413,28.752) 3.479,28.752 3.556,28.829 16.507,28.829 17.661,27.675 17.661,26.615 17.053,26.007 v1(17.053,25.786)
BSPDreset: Q1.3 R16.1 R18.1 | length 28.5
  Top Layer w0.254: Q1.3 30.805,23.445 31.242,23.008 v1(31.242,22.733) ; v1(52.69,21.821) 52.716,21.847 52.926,21.847 53.889,20.884 R18.1 53.889,19.741 54.409,19.221 54.409,18.477 R16.1
  Int2 (PWR) w0.254: v1(31.242,22.733) 51.778,22.733 v1(52.69,21.821)
CLKGateReset: Q2.12 R31.2 U9.7 | length 26
  Top Layer w0.254: U9.7 7.669,16.339 11.015,19.685 12.588,19.685 13.166,19.106 13.166,17.769 13.315,17.62 13.471,17.464 13.876,17.464 R31.2 14.112,17.524 14.301,17.524 15.262,18.486 15.262,27.309 16.224,28.27 17.616,28.27 19.064,29.718 Q2.12
CLKGateSet: Q2.11 R27.2 U3.2 U8.7 | length 45.3
  Top Layer w0.254: U8.7 7.614,2.292 7.874,2.032 9.017,2.032 9.565,2.58 10.662,3.677 R27.2 10.737,7.037 12.752,7.037 v1(12.827,7.112) ; v1(16.645,27.254) 17.87,27.254 19.064,28.448 Q2.11 22.073,28.448 24.167,30.542 24.187,30.542 25.077,31.432 25.077,31.917 U3.2
  Int2 (PWR) w0.254: v1(12.827,7.112) 11.43,8.509 11.43,22.04 v1(16.645,27.254)
GND: BP>30B.1 BPShrtGND.1 BSPDCLK.1 BSPDState.1 GND.1 OP1.4 OP2.4 pad.2 Q1.4 Q2.5 Q2.8 Q2.13 Q3.4 R1.2 R3.1 R7.2 R10.1 R15.1 R19.2 R22.2 R25.1 R29.1 T1.2 TPS>25%.1 TPSShrtGND.1 U1.2 U2.2 U4.2 U5.2 U6.1 U6.2 U7.1 U7.2 U8.2 U9.2 U10.2 | length 15
  Top Layer w0.254: R10.1 52.05,32.954 52.199,33.103 52.441,33.103 52.664,33.326 52.664,34.901 52.227,35.338 52.227,36.53 52.908,37.211 U5.2 54.508,37.211 56.007,38.71 v1(56.007,40.005) 57.321,41.319 57.321,42.439 56.59,43.17 R7.2
NetBP>30B_2: BP>30B.2 R35.2 | length 2.2
  Top Layer w0.254: BP>30B.2 54.495,28.609 R35.2
NetBPShrtGND_2: BPShrtGND.2 R34.1 | length 2.5
  Top Layer w0.254: R34.1 44.47,50.514 44.939,50.983 44.939,51.416 45.418,51.895 45.638,51.895 BPShrtGND.2
NetBSPDCLK_2: BSPDCLK.2 R37.1 | length 2.4
  Top Layer w0.254: BSPDCLK.2 1.82,26.816 2.013,26.816 2.765,26.064 3.115,26.064 R37.1
NetBSPDState_2: BSPDState.2 R36.2 | length 2
  Top Layer w0.254: BSPDState.2 33.546,23.864 R36.2
NetC1_1: C1.1 R17.2 T2.2 U6.7 | length 21.7
  Top Layer w0.254: C1.1 43.43,10.287 44.253,11.11 44.253,11.829 49.315,16.891 R17.2 50.096,18.814 50.34,19.058 50.34,20.752 51.653,22.066 51.653,22.533 51.957,22.837 53.075,22.837 53.23,22.682 54.053,22.682 54.277,22.905 54.277,23.592 54.425,23.741 T2.2
NetC1_2: C1.2 OP1.3 R16.2 R17.1 U6.8 | length 48.5
  Top Layer w0.254: OP1.3 43.035,26.182 45.466,28.614 v1(45.466,28.956) ; C1.2 51.346,10.753 R17.1@51.346,16.816 ; U6.8 U6.8@51.61,19.439 ; R16.2 53.321,18.49 53.098,18.713 53.023,18.713 52.457,19.279 51.769,19.279 U6.8@51.61,19.439 ; v1(53.594,14.224) 53.4,14.418 53.4,14.762 R17.1@51.346,16.816 ; R17.1@51.346,16.816 R17.1 51.346,18.794 51.61,19.058 U6.8@51.61,19.439
  Int1 (GND) w0.254: v1(45.466,28.956) 45.466,32.933 46.188,33.655 47.03,33.655 50.312,30.373 50.312,22.025 53.594,18.743 v1(53.594,14.224)
NetC2_1: C2.1 OP2.3 R20.2 R23.1 U7.8 | length 29.1
  Top Layer w0.254: v1(15.24,13.462) 17.138,13.462 C2.1 17.349,13.674 R20.2 ; v1(21.463,2.032) 19.293,2.032 R23.1 19.244,3.251 19.508,3.515 19.508,5.832 22.846,9.17 22.905,9.17 23.064,9.33 OP2.3
  Int1 (GND) w0.254: v1(15.24,13.462) 15.24,8.255 v1(21.463,2.032)
NetC2_2: C2.2 R23.2 T3.2 U7.7 | length 12.9
  Top Layer w0.254: C2.2 17.204,12.003 17.806,11.401 T3.2 18.703,11.35 19.131,11.35 20.189,10.291 20.189,8.127 18.238,6.176 U7.7 18.238,3.515 17.994,3.271 R23.2
NetD1_2: D1.2 R13.1 | length 5.1
  Top Layer w0.254: D1.2 35.841,30.688 36.064,30.465 36.423,30.465 36.957,29.931 36.957,28.923 38.541,27.339 R13.1
NetQ1_5: Q1.5 U3.4 | length 13.3
  Top Layer w0.254: U3.4 25.066,29.736 25.215,29.587 25.215,29.182 25.467,28.93 26.539,28.93 28.626,31.017 28.626,31.907 29.713,32.994 30.554,32.994 31.455,32.094 Q1.5
NetR1_1: R1.1 R2.2 R6.1 U1.1 | length 19.3
  Top Layer w0.254: R6.1 6.53,51.106 5.959,50.535 R2.2 6.02,49.088 v1(8.109,49.088) ; U1.1 10.048,41.059 12.418,41.059 R1.1 12.451,41.026 13.396,41.026 13.97,41.6 v1(13.97,44.45)
  Int1 (GND) w0.254: v1(8.109,49.088) 8.697,49.088 13.335,44.45 v1(13.97,44.45)
NetR3_2: R3.2 Trimmpoti.2 U2.8 | length 43
  Top Layer w0.254: v1(4.437,32.846) 5.22,33.629 U2.8 ; v1(4.445,30.099) 6.747,30.099 R3.2
  Int1 (GND) w0.254: v1(4.437,32.846) 4.441,32.842 4.441,30.103 v1(4.445,30.099) 14.479,20.065 21.504,20.065 Trimmpoti.2
NetR4_2: R4.2 R5.1 U2.1 | length 18.6
  Top Layer w0.254: R4.2 5.08,46.386 5.683,45.783 6.098,45.783 7.287,44.594 7.287,44.18 v1(7.481,43.985) ; R5.1 8.168,34.137 7.588,34.717 v1(7.588,34.992) 7.593,34.998 10.014,34.998 U2.1
  Int1 (GND) w0.254: v1(7.481,43.985) 7.534,43.932 7.534,35.045 v1(7.588,34.992)
NetR7_1: R7.1 R8.2 R9.1 U4.1 | length 19.3
  Top Layer w0.254: v1(51.211,35.746) 51.435,35.522 51.435,35.412 51.933,34.914 R8.2 ; v1(51.689,40.767) 51.689,40.806 U4.1@52.908,42.025 ; R9.1 52.16,42.773 U4.1@52.908,42.025 ; R7.1 56.462,41.973 53.761,41.973 U4.1 U4.1@52.908,42.025
  Int1 (GND) w0.254: v1(51.211,35.746) 51.36,35.895 51.562,35.895 51.562,40.64 v1(51.689,40.767)
NetR10_2: "Trimmpoti 2.2" R10.2 U5.8 | length 35.9
  Top Layer w0.254: U5.8 48.395,35.941 48.235,35.781 48.235,33.249 47.625,32.639 v1(46.609,32.639) 50.292,32.639 R10.2
  Int1 (GND) w0.254: 37.653,10.031 37.653,13.523 46.609,22.479 v1(46.609,32.639)
NetR11_2: R11.2 R12.1 U5.1 | length 26.1
  Top Layer w0.254: R12.1 52.333,30.118 52.333,30.235 53.035,30.937 53.035,32.979 53.172,33.116 53.172,35.918 53.195,35.941 54.508,35.941 56.007,37.44 56.007,37.886 57.829,39.708 57.829,43.929 52.596,49.163 52.592,49.163 52.197,49.558 R11.2
NetR13_2: R13.2 T1.1 | length 1.5
  Top Layer w0.254: R13.2 39.691,28.592 T1.1
NetR14_1: R14.1 T1.3 | length 2.6
  Top Layer w0.254: T1.3 40.767,33.131 R14.1
NetR14_2: R14.2 Relay.1 | length 7.2
  Top Layer w0.254: R14.2 R14.2@42.91,33.399
  Top Layer w0.5: Relay.1 37.441,34.215 37.666,34.44 37.666,34.505 37.959,34.798 41.511,34.798 R14.2@42.91,33.399
NetR15_2: R15.2 Relay.2 | length 4
  Top Layer w0.254: R15.2@40.264,36.495 R15.2
  Top Layer w0.5: Relay.2 R15.2@40.264,36.495
NetR18_2: R18.2 T2.1 | length 2.1
  Top Layer w0.254: T2.1 54.937,21.336 55.389,20.884 R18.2
NetR19_1: R19.1 T2.3 | length 2.2
  Top Layer w0.254: T2.3 53.642,25.276 R19.1
NetR21_2: R21.2 T3.1 | length 3.5
  Top Layer w0.254: T3.1 18.652,14.446 19.585,15.379 R21.2
NetR22_1: R22.1 T3.3 | length 1.7
  Top Layer w0.254: T3.3 21.489,11.901 R22.1
NetR24_1: R24.1 R25.2 U8.8 | length 24
  Top Layer w0.254: R24.1 R24.1@2.527,19.107 ; R25.2 6.102,23.129 4.289,21.317 4.289,20.869 R24.1@2.527,19.107 ; U8.8 8.884,5.386 7.031,7.239 5.08,7.239 3.915,8.404 3.915,17.719 R24.1@2.527,19.107
NetR26_2: R26.2 R27.1 U8.1 | length 5.2
  Top Layer w0.254: U8.1 8.884,10 9.044,10.16 10.519,10.16 R26.2@11.163,9.516 ; R27.1 10.662,9.015 R26.2@11.163,9.516 ; R26.2 R26.2@11.163,9.516
NetR28_1: R28.1 R29.2 U9.8 | length 6.9
  Top Layer w0.254: R28.1 8.939,13.24 U9.8 8.939,16.339 9.757,17.157 R29.2
NetR30_2: R30.2 R31.1 U9.1 | length 9.6
  Top Layer w0.254: R30.2 9.8,22.893 8.939,22.032 U9.1 13.096,20.339 13.818,19.616 13.818,18.422 R31.1
NetR32_1: R32.1 TPSShrtGND.2 | length 1.8
  Top Layer w0.254: R32.1 17.446,37.103 TPSShrtGND.2
NetR32_2: R32.2 T4.2 | length 1.8
  Top Layer w0.254: T4.2 15.491,38.678 15.816,38.353 R32.2
NetR33_1: R33.1 T5.2 | length 1.9
  Top Layer w0.254: R33.1 22.951,19.155 T5.2
NetR33_2: R33.2 TPS>25%.2 | length 2
  Top Layer w0.254: TPS>25%.2 20.888,20.789 R33.2
NetR34_2: R34.2 T6.2 | length 2.5
  Top Layer w0.254: T6.2 44.161,48.885 44.434,49.158 44.817,49.158 45.447,49.787 45.447,50.166 R34.2
NetR35_1: R35.1 T7.2 | length 1.9
  Top Layer w0.254: R35.1 56.195,30.357 T7.2
NetR36_1: R36.1 T8.2 | length 1.9
  Top Layer w0.254: R36.1 37.257,22.364 T8.2
NetR37_2: R37.2 T9.2 | length 2.6
  Top Layer w0.254: R37.2 3.661,26.768 4.202,26.768 4.699,26.271 4.699,25.739 4.972,25.466 T9.2
SDBSPDin: Relay.3 SDin.1 | length 22.1
  Top Layer w0.254: Relay.3 25.391,39.699 25.391,39.869 28.406,42.884 Relay.3@29.119,43.597
  Top Layer w1: Relay.3@28.491,42.799 34.226,42.799 34.812,43.385 34.812,44.123 35.49,44.801 35.549,44.801 35.837,45.089 36.634,45.089 SDin.1
  Top Layer w2: Relay.3@25.391,39.699 Relay.3@28.491,42.799
SDBSPDout: Relay.4 Relay.5 SDout.1 | length 9.1
  Top Layer w0.254: Relay.5 Relay.5@37.441,43.335
  Top Layer w1: Relay.4 Relay.5 39.017,43.335 40.894,45.212 SDout.1
Sensorfoult: Q2.9 Q3.2 R20.1 R21.1 | length 15.8
  Top Layer w0.254: R20.1 18.913,16.207 R21.1@19.585,16.879 ; R21.1 R21.1@19.585,16.879 ; Q3.2 22.121,26.605 21.299,26.605 20.602,25.908 Q2.9 19.064,25.908 18.383,25.227 18.383,18.081 R21.1@19.585,16.879
ShrtGNDdetection: Q2.1 Q2.6
TPS>25%: Q1.1 R5.2 T5.1 U2.7 | length 43.6
  Top Layer w0.254: U2.7 4.42,36.273 3.429,35.282 3.429,34.411 3.421,34.403 3.421,32.266 3.857,31.83 5.541,31.83 6.136,32.425 6.669,32.425 R5.2 6.818,32.499 7.337,31.98 7.337,31.891 7.859,31.369 v1(10.033,31.369) ; T5.1 27.786,21.055 v1(29.464,22.733) 29.485,22.754 29.485,24.903 Q1.1
  Int1 (GND) w0.254: v1(10.033,31.369) 18.669,22.733 v1(29.464,22.733)
TPSBPfoult: Q1.7 Q2.2 | length 23.8
  Top Layer w0.254: v1(11.938,31.242) 12.126,31.054 13.973,31.054 Q2.2 ; v1(30.134,31.978) 30.144,31.967 30.144,28.935 Q1.7
  Int1 (GND) w0.254: v1(11.938,31.242) 12.674,31.978 v1(30.134,31.978)
TPSin: R4.1 TPSin.1 U1.8 | length 33
  Top Layer w0.254: U1.8 6.02,41.088 8.497,43.565 8.497,45.227 ; R4.1 6.58,47.144 8.497,45.227 ; TPSin.1 30.73,45.174 19.854,45.174 19.45,45.579 8.849,45.579 8.497,45.227
TPSShrtGND: Q2.3 R6.2 T4.1 U1.7 | length 43.2
  Top Layer w0.254: v1(2.286,40.132) 2.286,40.178 4.466,42.358 U1.7@4.505,42.358 ; R6.2 5.08,51.106 4.757,50.783 4.682,50.783 4.456,50.557 3.948,50.557 2.921,49.53 2.921,43.942 U1.7@4.505,42.358 ; U1.7 U1.7@4.505,42.358 ; Q2.3 14.102,29.781 16.319,29.781 v1(16.383,29.845) 16.383,32.233 14.224,34.392 T4.1
  Int2 (PWR) w0.254: v1(2.286,40.132) 6.096,40.132 v1(16.383,29.845)
pads on no net: "Trimmpoti 2.3" OP1.1 OP1.5 OP1.8 OP2.1 OP2.5 OP2.8 Q2.7 Q2.14 Trimmpoti.3 U1.3 U1.4 U1.5 U2.3 U2.4 U2.5 U3.1 U3.3 U3.5 U4.3 U4.4 U4.5 U5.3 U5.4 U5.5 U6.3 U6.4 U6.5 U7.3 U7.4 U7.5 U8.3 U8.4 U8.5 U9.3 U9.4 U9.5

## Polygon pours and split planes (outlines as drawn)
GND on Top Layer "NONET_L-01_P-001" (solid, pour order 0): 0,53.086 58.039,53.086 58.039,0 0,0
5V on Bottom Layer "NONET_L-01_P-001" (solid, pour order 2): 0.127,53.086 58.166,53.086 58.166,0 0.127,0
GND on Int1 (GND) "NONET_L-01_P-001" (solid, pour order 7): -0.127,52.959 57.912,52.959 57.912,-0.127 -0.127,-0.127
5V on Int2 (PWR) "NONET_L-01_P-001" (solid, pour order 8): 0,52.959 58.039,52.959 58.039,-0.127 0,-0.127

## Silkscreen, mask and mechanical layers (free items; w line width, h text height)
Top Overlay:
  lines w0.254: 41.021,0.381 41.021,4.445
  text "1Set TPS" at 41.91,2.794 h1.52
  text "2Set Brake" at 41.783,0.635 h1.52
  text "2" at 39.243,0.508 h1.52
  text "1" at 26.67,0.381 h1.52
Bottom Overlay:
  text "BSPD Rev 1.1 / Lukas Deeken / Baltic Racing / 2020" at 43.035,25.077 h1.52
Board Outline:
  the board outline again, w0.254